# Altium PCB Dental Sensor - CAP.PcbDoc
Units mm, origin at the board's own origin, x right, y up, seen from the top; angles counter-clockwise.
Board outline 35.78 x 6.5 mm, 2 copper layers (Top Layer, Bottom Layer), stack 0.287 mm thick; 19 components, 13 nets, 73 pads, 42 vias.
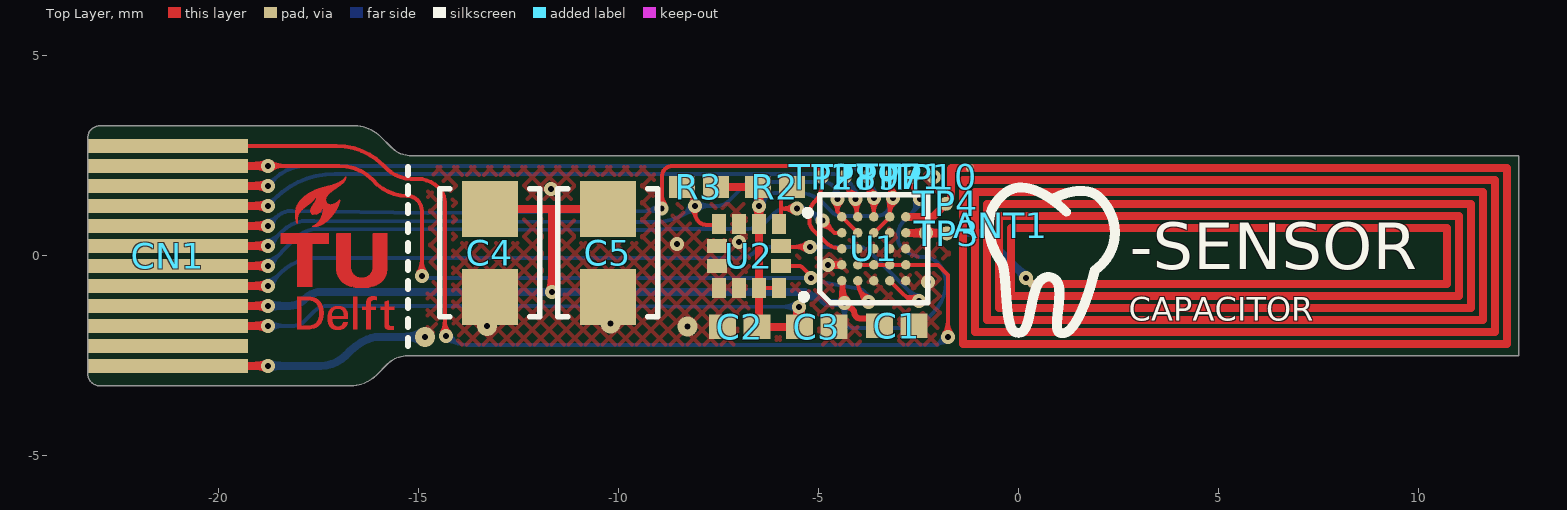
[diagram p0: Top Layer view]
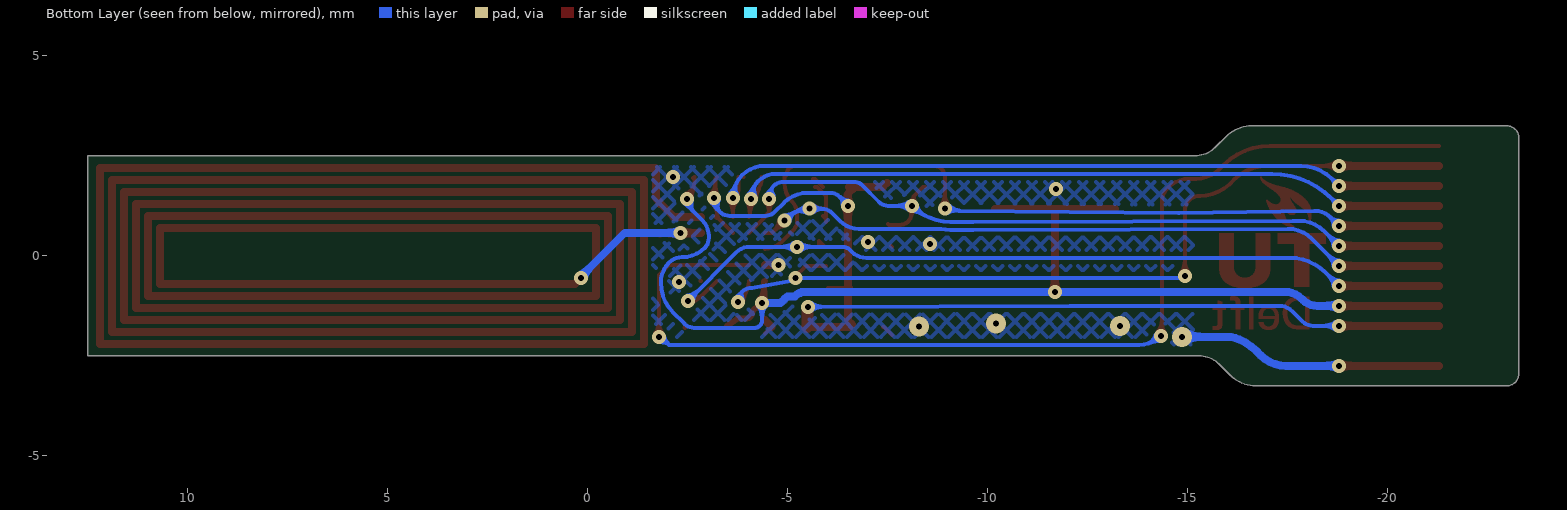
[diagram p1: Bottom Layer view, seen from below]

## Layer stack, top to bottom
Flex Stack Top Coverlay: solder mask 0.05, FC-001, Dk 4
Top Layer: signal copper 0.018
Core: core 0.051, Core-025, Dk 4.6
Bottom Layer: signal copper 0.018
Flex Stack Bottom Coverlay: solder mask 0.05, FC-001, Dk 4
Stiffener 1: core 0.2, Core-009, Dk 4.5

## Board outline
-22.984,-3.25 cw(c-22.975,-2.95) -23.275,-2.941 -23.275,2.941 -23.275,2.959 cw(c-22.975,2.95) -22.966,3.25 -16.6,3.25 cw(c-16.6,2.345) -15.96,2.985 -15.687,2.712 ccw(c-15.175,3.224) -15.175,2.5 12.5,2.5 12.5,-2.5 -15.275,-2.5 ccw(c-15.275,-3.224) -15.787,-2.712 -16.06,-2.985 cw(c-16.7,-2.345) -16.7,-3.25

## Design rules (kind name [scope] priority, off if disabled: settings)
BoardOutlineClearance "Edge Connector" [HasFootprint('52745-1297')] p1: gap=0 ignorepadtopadclearanceinfootprint=FALSE
BoardOutlineClearance [All] p2: gap=0.2 ignorepadtopadclearanceinfootprint=FALSE
Clearance Clearance_Testpad [InComponent('TP*')] p1: gap=0.1 ignorepadtopadclearanceinfootprint=FALSE except(0.06: Arc-SMDPad Track-SMDPad SMDPad-SMDPad)
Clearance [All] p2: gap=0.1 ignorepadtopadclearanceinfootprint=FALSE
ComponentClearance [InComponent('TP*')] p1: gap=0 collisioncheckmode=3 verticalgap=0.15 showdistances=FALSE
ComponentClearance ComponentClearance_1 [All] p2: gap=0.15 collisioncheckmode=3 verticalgap=0.15 showdistances=FALSE
HoleSize [All] p1: absolutevalues=TRUE maxlimit=2.54 minlimit=0.15 maxpercent=80.000 minpercent=20.000
MinimumAnnularRing [All] p1: minimumring=0.1
MinimumSolderMaskSliver BGA [HasFootprint('WLCSP25')] p1: minsoldermaskwidth=0.06
MinimumSolderMaskSliver [All] p2: minsoldermaskwidth=0.09
PolygonConnect [All] p1: connectstyle=Direct reliefconductorwidth=0.254 reliefentries=4 polygonreliefangle="90 Angle" airgapwidth=0.1
RoutingVias [All] p1: holewidth=0.15 width=0.35 viastyle="Through Hole" minholewidth=0.15 minwidth=0.35 maxholewidth=1 maxwidth=2
SilkToSolderMaskClearance [IsPad] p1: minsilkscreentomaskgap=0.2 clearancetoexposedcopper=TRUE
SolderMaskExpansion [All] p1: expansion=0.102 istentingtop=FALSE
UnRoutedNet [All] p1: checkbadconnections=TRUE
Width [All] p1: maxlimit=1 minlimit=0.06 preferedwidth=0.15 substack1={9C96DA8B-F9AD-4D0B-9D00-B80C23C507E5} minimp=50.000000 maximp=50.000000 favimp=50.000000
25 further rules are at their usual default settings.

## Components (designator, comment, footprint, x,y, rotation, side; value= is the part's Value field where it differs from the comment)
ANT1 "Antenna" "NFC Antenna" 5.275,-0.1 r0 top net-tie
C1 "0.10µF" CAPC1005X03N -3.05,-1.75 r0 top
C2 "2.2µF" CAPC1005X03N -6.975,-1.775 r180 top
C3 "0.10µF" CAPC1005X03N -5.05,-1.775 r0 top
C4 "CPH3225A" CPH3225A -13.225,0.075 r270 top
C5 "CPH3225A" CPH3225A -10.275,0.075 r270 top
CN1 "FPC Connector" 52745-1297 -21.275,0 r0 top locked
R2 "47K" RESC1005X03N -6.1,1.725 r180 top value=47k
R3 "47k" RESC1005X03N -8,1.725 r0 top
TP1 "Testpoint" "Testpoint 0.35mm" -2.662,1.975 r90 top
TP2 "Testpoint" "Testpoint 0.35mm" -4.923,1.975 r90 top
TP3 "Testpoint" "Testpoint 0.35mm" -1.8,0.561 r90 top
TP4 "Testpoint" "Testpoint 0.35mm" -1.822,1.3 r90 top
TP7 "Testpoint" "Testpoint 0.35mm" -3.225,1.975 r90 top
TP8 "Testpoint" "Testpoint 0.35mm" -4.348,1.975 r90 top
TP9 "Testpoint" "Testpoint 0.35mm" -3.774,1.975 r90 top
TP10 "Testpoint" "Testpoint 0.35mm" -2.125,1.975 r90 top
U1 "NHS3152UK" WLCSP25 -3.625,0.175 r90 top
U2 "AIS2DW12TR" FP-LGA12-DM00369449-MFG -6.75,0 r270 top

## Footprints (in the part's own frame and the unit in brackets; to place one, negate y for a bottom-side part, rotate by r counter-clockwise, add the part's x,y. Pads: shape width x height; smd on the part's side, far side on the other; paste and mask are expansions set on the pad)
52745-1297 [mm] "Cable Side"
  rect 4x0.35 smd paste-2: 1(0,-2.75) 2(0,-2.25) 3(0,-1.75) 4(0,-1.25) 5(0,-0.75) 6(0,-0.25) 7(0,0.25) 8(0,0.75) 9(0,1.25) 10(0,1.75) 11(0,2.25) 12(0,2.75)
CAPC1005X03N [mm] "Chip Capacitor, 2-Leads, Body 1,00x0,50mm, IPC Medium Density"
  rect 0.68x0.62 smd: 1(-0.43,0) 2(0.43,0)
  body extent -0.55,-0.28 0.55,0.27, height 0.3
CPH3225A [mm]
  rect 1.4x1.4 smd: 1(-1.1,0) 2(1.1,0)
  silkscreen extent -1.6,-1.25 1.6,1.25, body extent -1.6,-1.25 1.6,1.25, height 1
FP-LGA12-DM00369449-MFG [mm]
  rect 0.5x0.35 smd paste+0 mask+0: 1(-0.8,0.75) 2(-0.8,0.25) 3(-0.8,-0.25) 4(-0.8,-0.75) 7(0.8,-0.75) 8(0.8,-0.25) 9(0.8,0.25) 10(0.8,0.75)
  rect 0.35x0.5 smd paste+0 mask+0: 5(-0.25,-0.8) 6(0.25,-0.8) 11(0.25,0.8) 12(-0.25,0.8)
  silkscreen extent -1.12,1.43 -1.03,1.52, body extent -1.55,-1.55 1.55,1.55, height 0.25
"NFC Antenna" [mm] "4.5 x 15 mm"
  round 0.2 smd paste-2 mask+0.102: 1(-6.5,2.3) 2(-4.95,-0.6)
  Top Layer lines w0.2: -6.5,2.3 6.925,2.3 6.925,-2.1 -6.675,-2.1 -6.675,2 6.625,2 6.625,-1.8 -6.375,-1.8 -6.375,1.7 6.325,1.7 6.325,-1.5 -6.075,-1.5 -6.075,1.4 6.025,1.4 6.025,-1.175 ; -4.95,-0.6 5.425,-0.6 5.425,0.8 -5.475,0.8 -5.475,-0.9 5.725,-0.9 5.725,1.1 -5.775,1.1 -5.775,-1.2 6.025,-1.2
RESC1005X03N [mm] "Chip Resistor, 2-Leads, Body 1,00x0,50mm, IPC Medium Density"
  rect 0.65x0.55 smd: 1(-0.425,0) 2(0.425,0)
  body extent -0.55,-0.27 0.55,0.28, height 0.3
"Testpoint 0.35mm" [mm]
  round 0.35 smd paste-2 mask+0: 1(0,0)
WLCSP25 [mm]
  round 0.24 smd paste+0.018 mask+0.04: A1(-0.8,0.8) A2(-0.4,0.8) A3(0,0.8) A4(0.4,0.8) A5(0.8,0.8) B1(-0.8,0.4) B2(-0.4,0.4) B3(0,0.4) B4(0.4,0.4) B5(0.8,0.4) C1(-0.8,0) C2(-0.4,0) C3(0,0) C4(0.4,0) C5(0.8,0) D1(-0.8,-0.4) D2(-0.4,-0.4) D3(0,-0.4) D4(0.4,-0.4) D5(0.8,-0.4) E1(-0.8,-0.8) E2(-0.4,-0.8) E3(0,-0.8) E4(0.4,-0.8) E5(0.8,-0.8)
  silkscreen extent -1.35,-1.35 1.35,1.8, body extent -1.27,-1.27 1.27,1.27, height 0.54

## Part data
ANT1: library part "NFC Antenna", "Track 0.2; Gap 0.1; Height 4.6; Width 14.5;"
C1 C3: library part GRM155R60J104KA01D, "CAP CER 0.1UF 6.3V X5R 0402", Digi-Key Part Number=490-6287-1-ND, Manufacturer="Murata Electronics North America", Operating Temperature="-55°C ~ 85°C", Package / Case="0402 (1005 Metric)", Ratings=-, Temperature Coefficient=X5R, Tolerance=±10%, Voltage=6.3V, @ qty=0, Applications="General Purpose", Datasheets=http://www.murata.com/~/media/webrenewal/support/library/catalog/products/capacitor/mlcc/c02e.pdf, Factory Stock=0, Features=-, Height - Seated (Max)=-, Image=//media.digikey.com/Renders/Murata%20Renders/ZRB-SERIES-0402.jpg, Lead Spacing=-, Minimum Quantity=1, Mounting Type="Surface Mount, MLCC", Packaging="Cut Tape (CT)", Part Number=GRM155R60J104KA01D, Part Status=Active, Quantity Available=356062, Series=GRM, Size / Dimension="0.039\" L x 0.020\" W (1.00mm x 0.50mm)", Thickness (Max)="0.022\" (0.55mm)", Unit Price (USD)=0.1
C2: library part GRT155R60J225KE01D, "CAP CER 2.2UF 6.3V X5R 0402", Digi-Key Part Number=490-12250-1-ND, Manufacturer="Murata Electronics North America", Operating Temperature="-55°C ~ 85°C", Package / Case="0402 (1005 Metric)", Ratings=AEC-Q200, Temperature Coefficient=X5R, Tolerance=±10%, Voltage=6.3V, @ qty=0, Applications=Automotive, Datasheets=http://search.murata.co.jp/Ceramy/image/img/A01X/G101/ENG/GRT155R60J225KE01-01.pdf, Factory Stock=0, Features=-, Height - Seated (Max)=-, Image=//media.digikey.com/Renders/Murata%20Renders/ZRB-SERIES-0402.jpg, Lead Spacing=-, Lead Style=-, Minimum Quantity=1, Mounting Type="Surface Mount, MLCC", Packaging="Cut Tape (CT)", Part Number=GRT155R60J225KE01D, Part Status=Active, Quantity Available=39775, Series=GRT, Size / Dimension="0.039\" L x 0.020\" W (1.00mm x 0.50mm)", Thickness (Max)="0.022\" (0.55mm)", Unit Price (USD)=0.12
C4 C5: "Supercapacitors / Ultracapacitors Reflow EDLC 3.3V, 11mF, 160 Ohm"
CN1: library part 52745-1297, "FFC / FPC Board Connector, 0.5 mm, 12 Contacts, Receptacle, Easy-On 52745, Surface Mount, Top"
R2 R3: library part ERJ-2RKF4702X, "RES SMD 47K OHM 1% 1/10W 0402", Digi-Key Part Number=P47.0KLCT-ND, Manufacturer="Panasonic Electronic Components", Operating Temperature="-55°C ~ 155°C", Package / Case="0402 (1005 Metric)", Power (Watts)="0.1W, 1/10W", Supplier Device Package=0402, Temperature Coefficient=±100ppm/°C, Tolerance=±1%, @ qty=1500, Composition="Thick Film", Datasheets=http://industrial.panasonic.com/www-cgi/jvcr13pz.cgi?E+PZ+3+AOA0002+ERJ2RKF4702X+7+WW, Factory Stock=0, Failure Rate=-, Features="Automotive AEC-Q200", Height - Seated (Max)="0.016\" (0.40mm)", Image=//media.digikey.com/Photos/Panasonic%20Photos/ERJ-PA2-Series.jpg, Minimum Quantity=1, Number of Terminations=2, Packaging="Cut Tape (CT)", Part Number=ERJ-2RKF4702X, Part Status=Active, Quantity Available=230515, Series=ERJ, Size / Dimension="0.039\" L x 0.020\" W (1.00mm x 0.50mm)", Unit Price (USD)=0.00496
U1: "ARM-microcontrollers - MCU NTAG NHS3152 NFC"
U2: library part CMP-12175-000014-1, "MEMS DIGITAL OUTPUT MOTION SENSO", RoHS Compliant=Yes

## Via types
v1: diameter 0.35, hole 0.15, Top Layer to Bottom Layer, tented both sides, 38 vias
v2: diameter 0.5, hole 0.15, Top Layer to Bottom Layer, tented both sides, 4 vias

## Nets (pads, with @x,y where several pads share a name; then routed paths per layer and width w, separated by ;. In a path a pad name is that pad's centre, name@x,y a point inside that pad or via, vN(x,y) a via of type N, cw(c..) or ccw(c..) an arc to the next point about the centre after c; other vN are vias at no path point)
GND: C1.2 C2.2 C3.2 C4.2 C5.2 CN1.1 TP10.1 U1.A2 U1.B3 U1.C1 U1.C3 U1.D3 U1.D4 U1.E1 U1.E3 U2.3 U2.5 U2.6 U2.7 U2.8 | length 7.8
  Top Layer w0.1: C2.2@-7.605,-1.975 C2.2 C2.2@-7.375,-1.775 ; U2.5@-7.6,0.225 U2.5@-7.584,0.241 ; C3.2@-4.595,-1.775 C3.2@-4.433,-1.937 ; U1.E1 U1.E1@-2.823,-0.627 ; C1.2@-2.425,-1.799 C1.2@-2.419,-1.794
  Top Layer w0.2: CN1.1 v1(-18.775,-2.75) ; v1(-4.765,-0.233) -4.433,-0.233 U1.A2 ; C3.2@-4.595,-1.775 C3.2@-4.43,-1.61
  Bottom Layer w0.2: v1(-18.775,-2.75) -17.452,-2.75 ccw(c-17.452,-1.861) -16.829,-2.496 ccw(c-16.969,-2.353) -16.819,-2.485 cw(c-15.648,-3.511) -16.294,-2.094 cw(c-15.975,-2.793) -15.975,-2.025 v2(-14.849,-2.025)
  other v1: -2.275,-0.65 -8.55,0.3 -7,0.35 -11.7,1.675 -2.125,1.975
  other v2: -8.282,-1.774 -13.3,-1.75 -10.207,-1.699
INT2: CN1.11 U1.B1 U2.11 | length 21.3
  Top Layer w0.1: v1(-18.775,2.25) -16.995,2.25 cw(c-16.995,1.055) -16.151,1.901 ccw(c-15.299,2.603) -15.299,1.499 cw(c-15.299,1.125) -14.925,1.125 v1(-14.925,-0.5) ; U2.11 -5.521,-0.25 cw(c-5.521,-0.421) -5.4,-0.3 -5.236,-0.464 v1(-5.198,-0.554) ; U1.B1 ccw(c-3.398,-0.625) -3.841,-1.068 v1(-3.755,-1.155)
  Top Layer w0.2: CN1.11 v1(-18.775,2.25)
  Bottom Layer w0.1: v1@-14.925,-0.555 -5.573,-0.555 v1(-5.198,-0.554) ; v1(-5.198,-0.554) -5.14,-0.614 -4.1,-0.8 cw(c-4.1,-1.145) v1@-3.755,-1.145
NetANT1_1: ANT1.1 TP4.1 U1.E5 | length 2.6
  Top Layer w0.2: U1.E5 -2.147,0.975 TP4.1 TP4.1@-1.8,1.3 ; TP4.1@-1.795,1.305 -1.795,1.346 -1.7,1.441 -1.7,2.177 -1.677,2.2 ANT1.1
NetANT1_2: ANT1.2 TP3.1 U1.E4 | length 4.2
  Top Layer w0.2: U1.E4 -2.818,0.568 -1.807,0.568 TP3.1 ; v1(0.175,-0.55) ANT1.2
  Bottom Layer w0.2: v1(-2.319,0.575) -0.925,0.575 v1@0.187,-0.537
RESET: CN1.8 TP2.1 U1.A3 | length 20
  Top Layer w0.1: v1(-8.926,1.184) -8.893,1.184 cw(c-8.893,0.641) v1@-8.838,1.182 ; v1@-8.884,1.227 -8.925,1.268 -8.925,1.975 cw(c-8.65,1.975) -8.65,2.25 -5.198,2.25 cw(c-5.198,2.018) -4.966,2.018 TP2.1 -4.923,1.8 cw(c-5.575,1.8) -5.114,1.339 ccw(c-4.819,1.044) -5.236,1.044 -5.236,0.903 ccw(c-4.912,0.877) -5.117,0.625 -4.838,0.346 ccw(c-4.425,0.759) U1.A3
  Top Layer w0.2: CN1.8 v1(-18.775,0.75)
  Bottom Layer w0.1: v1(-18.775,0.75) -18.559,0.966 cw(c-18.489,0.894) -18.555,0.969 -18.512,1.007 cw(c-18.446,0.932) -18.507,1.012 cw(c-18.175,0.582) -18.175,1.125 cw(c-18.175,1.025) -18.174,1.125 -14.78,1.075 ccw(c-14.775,1.4) -14.772,1.075 -9.302,1.125 ; -9.301,1.125 ccw(c-9.301,1.225) -9.285,1.126 v1(-8.926,1.184)
SCL: CN1.6 R2.1 U1.A4 U2.1 | length 19.4
  Top Layer w0.1: U2.1@-5.95,0.85 U2.1@-5.95,0.917 ; U2.1@-5.875,0.992 U2.1@-5.95,0.917 ; R2.1@-5.875,1.725 -5.675,1.925 R2.1@-5.625,1.925 ; R2.1 -5.725,1.725 -5.95,1.5 -5.95,1.209 ; v1(-5.548,1.179) -5.879,1.179 cw(c-5.879,1.279) -5.95,1.209 ; v1(-4.912,0.877) -4.61,0.575 U1.A4 ; U2.1@-5.95,0.917 -5.95,1.209
  Top Layer w0.2: CN1.6 v1(-18.775,-0.25)
  Bottom Layer w0.1: v1(-18.775,-0.25) -18.097,0.428 cw(c-17.5,-0.17) -17.5,0.675 ; -17.5,0.675 -9.626,0.65 -9.066,0.65 ccw(c-9.066,2.216) -8.825,0.669 cw(c-8.775,0.347) -8.774,0.672 -7,0.675 -6.775,0.675 ccw(c-6.775,1.339) -6.306,0.869 -6.106,1.069 cw(c-5.85,0.813) -5.85,1.175 -5.553,1.175 v1(-5.548,1.179) cw(c-5.548,0.372) -4.977,0.943 v1(-4.912,0.877)
SDA: CN1.7 R3.1 U1.A5 U1.B4 U2.4 | length 20.2
  Top Layer w0.1: R3.1 -8.375,1.725 -8.15,1.5 -8.15,1.368 -8.1,1.318 v1(-8.1,1.25) -8.1,1.091 ccw(c-7.759,1.091) -8,0.85 ccw(c-7.819,1.031) -7.819,0.775 -7.525,0.775 U2.4 ; v1(-4.536,1.421) -4.536,1.111 -4.425,1 U1.A5 U1.B4
  Top Layer w0.2: CN1.7 v1(-18.775,0.25)
  Bottom Layer w0.1: v1(-18.775,0.25) -18.415,0.61 cw(c-17.774,-0.031) -17.774,0.875 -17.625,0.875 -9.625,0.85 -9.066,0.85 ccw(c-9.066,2.216) v1(-8.1,1.25) -7.5,1.25 ccw(c-7.5,1.552) -7.287,1.338 -6.863,1.762 cw(c-6.65,1.548) -6.65,1.85 -4.9,1.85 cw(c-4.9,1.486) -4.536,1.486 v1(-4.536,1.421)
SWCLK: CN1.9 TP8.1 U1.B5 | length 18.9
  Top Layer w0.1: TP8.1 ccw(c-3.668,1.975) -4.149,1.494 v1(-4.08,1.425) v1@-4.08,1.434 ; v1@-4.052,1.443 -4.052,1.002 U1.B5
  Top Layer w0.2: CN1.9 v1(-18.775,1.25)
  Bottom Layer w0.1: v1(-18.775,1.25) -18.594,1.431 cw(c-17.1,-0.062) -17.1,2.05 -4.705,2.05 cw(c-4.705,1.425) v1(-4.08,1.425)
SWDIO: CN1.10 TP9.1 U1.C5 | length 19.3
  Top Layer w0.1: TP9.1 -3.774,1.809 ccw(c-3.266,1.809) -3.629,1.454 ccw(c-3.266,1.809) v1(-3.625,1.45) U1.C5
  Top Layer w0.2: CN1.10 v1(-18.775,1.75)
  Bottom Layer w0.1: v1(-18.775,1.75) -18.593,1.932 cw(c-17.825,1.164) -17.825,2.25 -4.425,2.25 cw(c-4.425,1.45) v1(-3.625,1.45)
TX: CN1.12 U1.B2 U1.C2 U1.D2 U1.E2 | length 27.4
  Top Layer w0.1: CN1.12 -17.059,2.75 cw(c-17.059,1.099) -15.891,2.266 -15.797,2.172 ccw(c-15.2,2.77) -15.2,1.925 -15.043,1.925 cw(c-15.043,1.157) -14.5,1.7 cw(c-14.862,1.338) -14.35,1.338 -14.35,-1.975 v1(-14.325,-2) ; U1.B2 U1.C2 U1.D2 U1.E2 -2.025,-0.225 -1.775,-0.475 v1(-1.775,-2.025)
  Bottom Layer w0.1: v1(-14.325,-2) ccw(c-13.782,-1.457) -13.782,-2.225 -2.035,-2.225 -1.835,-2.025 v1(-1.775,-2.025)
VDDBAT: C1.1 C4.1 C5.1 CN1.4 TP1.1 U1.A1 | length 31.3
  Top Layer w0.1: TP1.1@-2.632,1.945 TP1.1 -2.662,1.877 ccw(c-2.023,1.877) v1(-2.475,1.425) v1@-2.475,1.493
  Top Layer w0.15: U1.A1 -4.408,-0.642 v1@-4.408,-1.082 ; v1@-4.37,-1.128 v1@-4.37,-1.12 ; v1(-4.356,-1.175) -4.259,-1.273 ccw(c-4.153,-1.166) -4.213,-1.303 cw(c-4.28,-1.465) -4.107,-1.44 ccw(c-3.958,-1.418) -3.958,-1.568 -3.745,-1.568 C1.1
  Top Layer w0.2: CN1.4 v1(-18.775,-1.25) ; C4.1@-13.175,1.175 -11.675,1.175 ; v1(-11.675,-0.9) -11.675,1.175 ; C5.1@-10.175,1.175 -11.675,1.175
  Bottom Layer w0.1: v1(-4.356,-1.175) -4.356,-1.625 ccw(c-4.181,-1.625) -4.19,-1.8 -2.656,-1.8 ccw(c-2.656,-1.458) -2.389,-1.672 -2.131,-1.414 ccw(c-2.87,-0.675) -1.825,-0.675 ccw(c-2.541,-0.675) -2.034,-0.17 ccw(c-2.355,-0.489) -2.356,-0.036 cw(c-2.355,0.77) -2.925,0.2 cw(c-2.684,0.441) -3.025,0.441 -3.025,0.495 cw(c-2.47,0.495) -2.863,0.887 -2.481,1.269 -2.481,1.419 v1(-2.475,1.425)
  Bottom Layer w0.2: v1(-18.775,-1.25) -18.237,-1.25 ccw(c-18.237,-0.738) -17.875,-1.1 -17.852,-1.077 cw(c-17.425,-1.504) -17.425,-0.9 -5.343,-0.9 -5.317,-0.926 -5.292,-0.926 -5.224,-0.969 -5.181,-1.012 -4.989,-1.012 -4.917,-1.084 -4.913,-1.09 ccw(c-4.749,-0.975) -4.872,-1.133 -4.818,-1.175 -4.749,-1.175 v1(-4.356,-1.175)
VEXT: C2.1 C3.1 CN1.3 R2.2 R3.2 TP7.1 U1.C4 U1.D5 U2.2 U2.9 U2.10 | length 28.1
  Top Layer w0.1: U2.9@-6.528,-0.8 U2.9 U2.10 ; U1.C4 U1.D5 ; TP7.1 -3.187,1.937 -3.187,1.481 v1(-3.15,1.444) -3.15,1.376 -3.225,1.301 -3.225,0.986 U1.D5@-3.22,0.98
  Top Layer w0.15: U1.D5 U1.D5@-3.22,0.98
  Top Layer w0.2: CN1.3 v1(-18.775,-1.75) ; R3.2@-7.475,1.825 -7.375,1.725 R2.2 ; R2.2@-6.625,1.675 -6.5,1.55 v1(-6.5,1.25) U2.2 -6.5,-0.772 -6.528,-0.8 -6.5,-0.828 -6.5,-1.61 C2.1@-6.605,-1.715 ; C2.1 C3.1
  Top Layer w0.3: v1(-5.5,-1.275) -5.49,-1.285 -5.49,-1.765 C3.1
  Bottom Layer w0.1: v1(-18.775,-1.75) -18.125,-1.75 ccw(c-18.125,-1.388) -17.869,-1.644 ; -17.869,-1.644 -17.616,-1.391 cw(c-17.275,-1.733) -17.275,-1.25 -12.059,-1.25 v1(-5.5,-1.275) ; v1(-6.5,1.25) cw(c-6.44,1.25) -6.482,1.293 -6.3,1.475 cw(c-6.059,1.234) -6.059,1.575 -5.504,1.575 cw(c-5.504,0.721) -4.9,1.325 -4.671,1.096 ccw(c-4.439,1.328) -4.439,1 -3.541,1 ccw(c-3.541,1.341) -3.3,1.1 -3.287,1.113 ccw(c-3.618,1.444) v1(-3.15,1.444)
WAKE_UP: CN1.5 U1.D1 U2.12 | length 21.5
  Top Layer w0.1: U2.12@-5.887,0.263 -5.775,0.375 -5.775,0.25 -5.75,0.225 v1(-5.225,0.225) ; U1.D1 -2.884,-0.966 ccw(c-2.5,-0.582) v1(-2.5,-1.125) v1@-2.548,-1.077
  Top Layer w0.2: CN1.5 v1(-18.775,-0.75)
  Bottom Layer w0.1: v1@-18.765,-0.75 v1(-18.775,-0.75) -18.446,-0.421 cw(c-17.55,-1.317) -17.55,-0.05 -6.962,-0.05 ccw(c-6.962,0.462) -6.6,0.1 -6.546,0.154 cw(c-6.375,-0.016) -6.375,0.225 v1(-5.225,0.225) -4.05,0.225 cw(c-4.05,-0.258) -3.709,0.084 v1(-2.5,-1.125)
pads on no net: CN1.2

## Polygon pours and split planes (outlines as drawn)
no net on Layer0 "Default Coverlay 1 Top" (split plane): -22.984,-3.25 -23.044,-3.248 -23.153,-3.199 -23.234,-3.112 -23.277,-3.001 -23.275,-2.941 -23.275,2.941 -23.275,2.959 -23.273,3.019 -23.224,3.128 -23.137,3.209 -23.026,3.252 -22.966,3.25 -16.6,3.25 -16.511,3.25 -16.336,3.215 -16.171,3.147 -16.023,3.048 -15.96,2.985 -15.687,2.712 -15.634,2.664 -15.516,2.586 -15.385,2.531 -15.246,2.503 -15.175,2.5 12.5,2.5 12.5,-2.5 -15.275,-2.5 -15.346,-2.503 -15.485,-2.531 -15.616,-2.586 -15.734,-2.664 -15.787,-2.712 -16.123,-3.048 -16.271,-3.147 -16.436,-3.215 -16.611,-3.25 -16.7,-3.25
no net on Layer0 "Default Coverlay 1 Bottom" (split plane): -22.984,-3.25 -23.044,-3.248 -23.153,-3.199 -23.234,-3.112 -23.277,-3.001 -23.275,-2.941 -23.275,2.941 -23.275,2.959 -23.273,3.019 -23.224,3.128 -23.137,3.209 -23.026,3.252 -22.966,3.25 -16.6,3.25 -16.511,3.25 -16.336,3.215 -16.171,3.147 -16.023,3.048 -15.96,2.985 -15.687,2.712 -15.634,2.664 -15.516,2.586 -15.385,2.531 -15.246,2.503 -15.175,2.5 12.5,2.5 12.5,-2.5 -15.275,-2.5 -15.346,-2.503 -15.485,-2.531 -15.616,-2.586 -15.734,-2.664 -15.787,-2.712 -16.123,-3.048 -16.271,-3.147 -16.436,-3.215 -16.611,-3.25 -16.7,-3.25
GND on Bottom Layer "TGA" (hatched 45Degree grid 0.3 track 0.1, remove dead copper, pour order 0): -15.122,3.25 -1.625,3.25 -1.625,-3.25 -15.128,-3.25
GND on Top Layer "TGA" (hatched 45Degree grid 0.3 track 0.1, remove dead copper, pour order 1): -14.773,2.548 -1.745,2.548 -1.745,-2.524 -14.778,-2.524

## Other copper
Top Layer:
  region: -15.75,-1.13 -15.75,-1.271 -15.747,-1.271 -15.747,-1.274 -15.618,-1.274 -15.618,-1.345 -15.621,-1.345 -15.621,-1.348 -15.75,-1.348 -15.75,-1.718 -15.747,-1.718 -15.747,-1.732 -15.744,-1.732 -15.744,-1.738 -15.741,-1.738 -15.741,-1.741 -15.739,-1.741 -15.739,-1.746 -15.736,-1.746 -15.736,-1.749 -15.733,-1.749 -15.733,-1.752 -15.727,-1.752 -15.727,-1.755 -15.724,-1.755 -15.724,-1.758 -15.718,-1.758 -15.718,-1.761 -15.713,-1.761 -15.713,-1.764 -15.701,-1.764 -15.701,-1.767 -15.684,-1.767 -15.684,-1.769 -15.675,-1.769 -15.675,-1.767 -15.647,-1.767 -15.647,-1.764 -15.633,-1.764 -15.633,-1.761 -15.624,-1.761 -15.624,-1.844 -15.635,-1.844 -15.635,-1.847 -15.658,-1.847 -15.658,-1.85 -15.739,-1.85 -15.739,-1.847 -15.761,-1.847 -15.761,-1.844 -15.773,-1.844 -15.773,-1.841 -15.784,-1.841 -15.784,-1.838 -15.793,-1.838 -15.793,-1.835 -15.799,-1.835 -15.799,-1.832 -15.804,-1.832 -15.804,-1.83 -15.81,-1.83 -15.81,-1.827 -15.816,-1.827 -15.816,-1.824 -15.819,-1.824 -15.819,-1.821 -15.825,-1.821 -15.825,-1.818 -15.827,-1.818 -15.827,-1.815 -15.83,-1.815 -15.83,-1.812 -15.833,-1.812 -15.833,-1.807 -15.836,-1.807 -15.836,-1.804 -15.839,-1.804 -15.839,-1.798 -15.842,-1.798 -15.842,-1.795 -15.845,-1.795 -15.845,-1.789 -15.847,-1.789 -15.847,-1.781 -15.85,-1.781 -15.85,-1.772 -15.853,-1.772 -15.853,-1.755 -15.856,-1.755 -15.856,-1.351 -15.859,-1.351 -15.859,-1.348 -15.953,-1.348 -15.953,-1.274 -15.859,-1.274 -15.859,-1.271 -15.856,-1.271 -15.856,-1.153 -15.85,-1.153 -15.85,-1.15 -15.842,-1.15 -15.842,-1.148 -15.833,-1.148 -15.833,-1.145 -15.825,-1.145 -15.825,-1.142 -15.813,-1.142 -15.813,-1.139 -15.804,-1.139 -15.804,-1.136 -15.796,-1.136 -15.796,-1.133 -15.787,-1.133 -15.787,-1.13 -15.779,-1.13 -15.779,-1.127 -15.767,-1.127 -15.767,-1.125 -15.759,-1.125 -15.759,-1.122 -15.75,-1.122 -15.75,-1.127
  region: 301 vertices and 1 holes, not listed, extent -18.039,-1.832 -17.38,-1.027
  region: 495 vertices and 1 holes, not listed, extent -17.277,-1.85 -16.77,-1.256
  region: -16.641,-1.07 -16.641,-1.027 -16.535,-1.027 -16.535,-1.832 -16.641,-1.832 -16.641,-1.073
  region: -16.311,-1.787 -16.311,-1.348 -16.417,-1.348 -16.417,-1.274 -16.314,-1.274 -16.314,-1.271 -16.311,-1.271 -16.311,-1.159 -16.309,-1.159 -16.309,-1.136 -16.306,-1.136 -16.306,-1.122 -16.303,-1.122 -16.303,-1.11 -16.3,-1.11 -16.3,-1.105 -16.297,-1.105 -16.297,-1.096 -16.294,-1.096 -16.294,-1.09 -16.291,-1.09 -16.291,-1.087 -16.289,-1.087 -16.289,-1.082 -16.286,-1.082 -16.286,-1.076 -16.283,-1.076 -16.283,-1.073 -16.28,-1.073 -16.28,-1.067 -16.277,-1.067 -16.277,-1.064 -16.274,-1.064 -16.274,-1.062 -16.271,-1.062 -16.271,-1.059 -16.268,-1.059 -16.268,-1.056 -16.266,-1.056 -16.266,-1.053 -16.263,-1.053 -16.263,-1.05 -16.257,-1.05 -16.257,-1.047 -16.254,-1.047 -16.254,-1.044 -16.251,-1.044 -16.251,-1.041 -16.246,-1.041 -16.246,-1.039 -16.243,-1.039 -16.243,-1.036 -16.237,-1.036 -16.237,-1.033 -16.231,-1.033 -16.231,-1.03 -16.225,-1.03 -16.225,-1.027 -16.217,-1.027 -16.217,-1.024 -16.211,-1.024 -16.211,-1.021 -16.203,-1.021 -16.203,-1.019 -16.191,-1.019 -16.191,-1.016 -16.18,-1.016 -16.18,-1.013 -16.094,-1.013 -16.094,-1.016 -16.082,-1.016 -16.082,-1.019 -16.068,-1.019 -16.068,-1.021 -16.059,-1.021 -16.059,-1.024 -16.056,-1.024 -16.056,-1.107 -16.059,-1.107 -16.059,-1.11 -16.091,-1.11 -16.091,-1.107 -16.134,-1.107 -16.134,-1.11 -16.154,-1.11 -16.154,-1.113 -16.165,-1.113 -16.165,-1.116 -16.171,-1.116 -16.171,-1.119 -16.177,-1.119 -16.177,-1.122 -16.182,-1.122 -16.182,-1.125 -16.185,-1.125 -16.185,-1.127 -16.188,-1.127 -16.188,-1.133 -16.191,-1.133 -16.191,-1.136 -16.194,-1.136 -16.194,-1.142 -16.197,-1.142 -16.197,-1.15 -16.2,-1.15 -16.2,-1.162 -16.203,-1.162 -16.203,-1.271 -16.2,-1.271 -16.2,-1.274 -16.074,-1.274 -16.074,-1.348 -16.203,-1.348 -16.203,-1.832 -16.311,-1.832 -16.311,-1.789
  region: 1200 vertices and 0 holes, not listed, extent -18.089,0.72 -16.815,1.98
  region: -18.036,-0.234 -18.036,0.298 -18.041,0.298 -18.041,0.302 -18.453,0.302 -18.453,0.307 -18.458,0.307 -18.458,0.317 -18.453,0.317 -18.453,0.552 -18.458,0.552 -18.458,0.556 -18.453,0.556 -18.453,0.566 -17.246,0.566 -17.246,0.302 -17.658,0.302 -17.658,0.298 -17.663,0.298 -17.663,-0.78 -18.036,-0.78 -18.036,-0.239
  region: 396 vertices and 0 holes, not listed, extent -17.064,-0.804 -15.785,0.561

## Silkscreen, mask and mechanical layers (free items; w line width, h text height)
Flex Stack Top Overlay:
  drawing of 12 lines, arcs and shapes, not listed
  text "-SENSOR" at 2.775,-0.725 h2
  text "CAPACITOR" at 2.75,-1.825 h1
Flex Stack Top Coverlay:
  drawing of 8 lines, arcs and shapes, not listed
Board Shape:
  lines w0.05: -23.275,2.941 -23.275,-2.941 ccw(c-22.975,-2.95) -22.984,-3.25 -16.7,-3.25 ccw(c-16.7,-2.345) -16.06,-2.985 -15.787,-2.712 cw(c-15.275,-3.224) -15.275,-2.5 12.5,-2.5 12.5,2.5 -15.175,2.5 cw(c-15.175,3.224) -15.687,2.712 -15.96,2.985 ccw(c-16.6,2.345) -16.6,3.25 -22.966,3.25 ccw(c-22.975,2.95) -23.275,2.959
Assembly Notes:
  lines w0.1: -23.275,2.941 -23.275,-2.941 ccw(c-22.975,-2.95) -22.984,-3.25 -16.7,-3.25 ccw(c-16.7,-2.345) -16.06,-2.985 -15.787,-2.712 cw(c-15.275,-3.224) -15.275,-2.5 -1.575,-2.5 -1.575,2.5 -15.175,2.5 cw(c-15.175,3.224) -15.687,2.712 -15.96,2.985 ccw(c-16.6,2.345) -16.6,3.25 -22.966,3.25 ccw(c-22.975,2.95) -23.275,2.959